# Altium PCB Alarm_PCB_1.PcbDoc
Units mm, origin at the board's own origin, x right, y up, seen from the top; angles counter-clockwise.
Board outline 100.84 x 60.32 mm, 2 copper layers (Top Layer, Bottom Layer); 32 components, 36 nets, 129 pads, 7 vias.
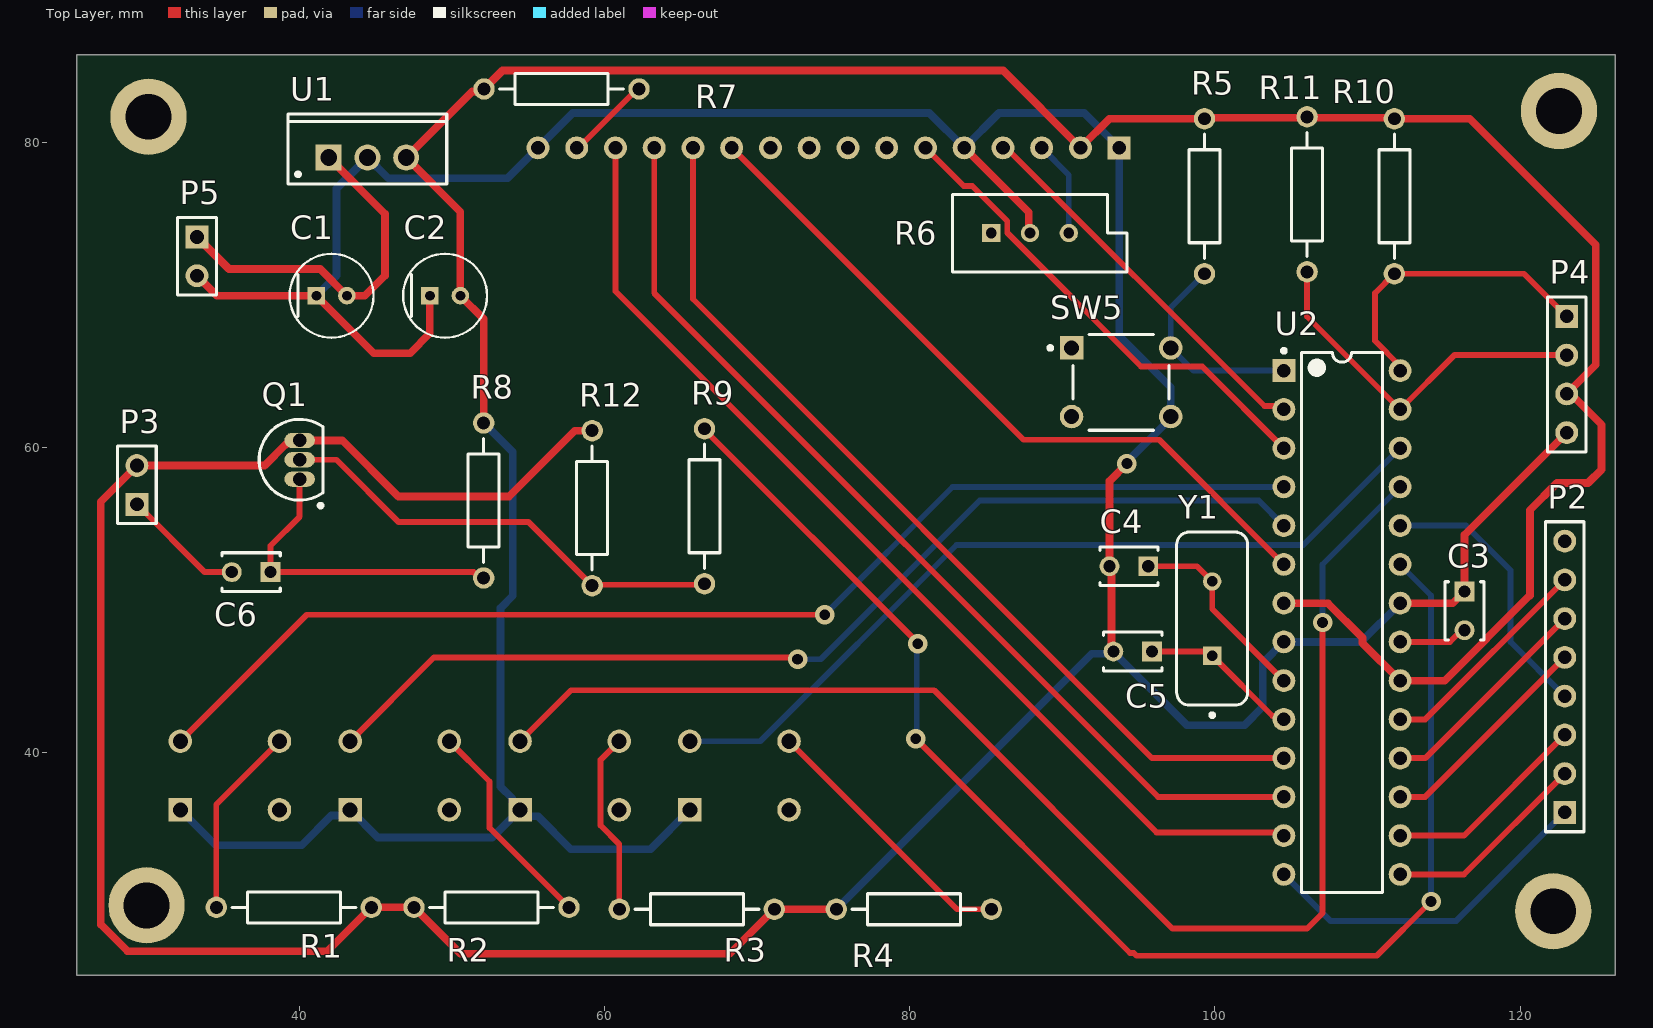
[diagram p0: Top Layer view]
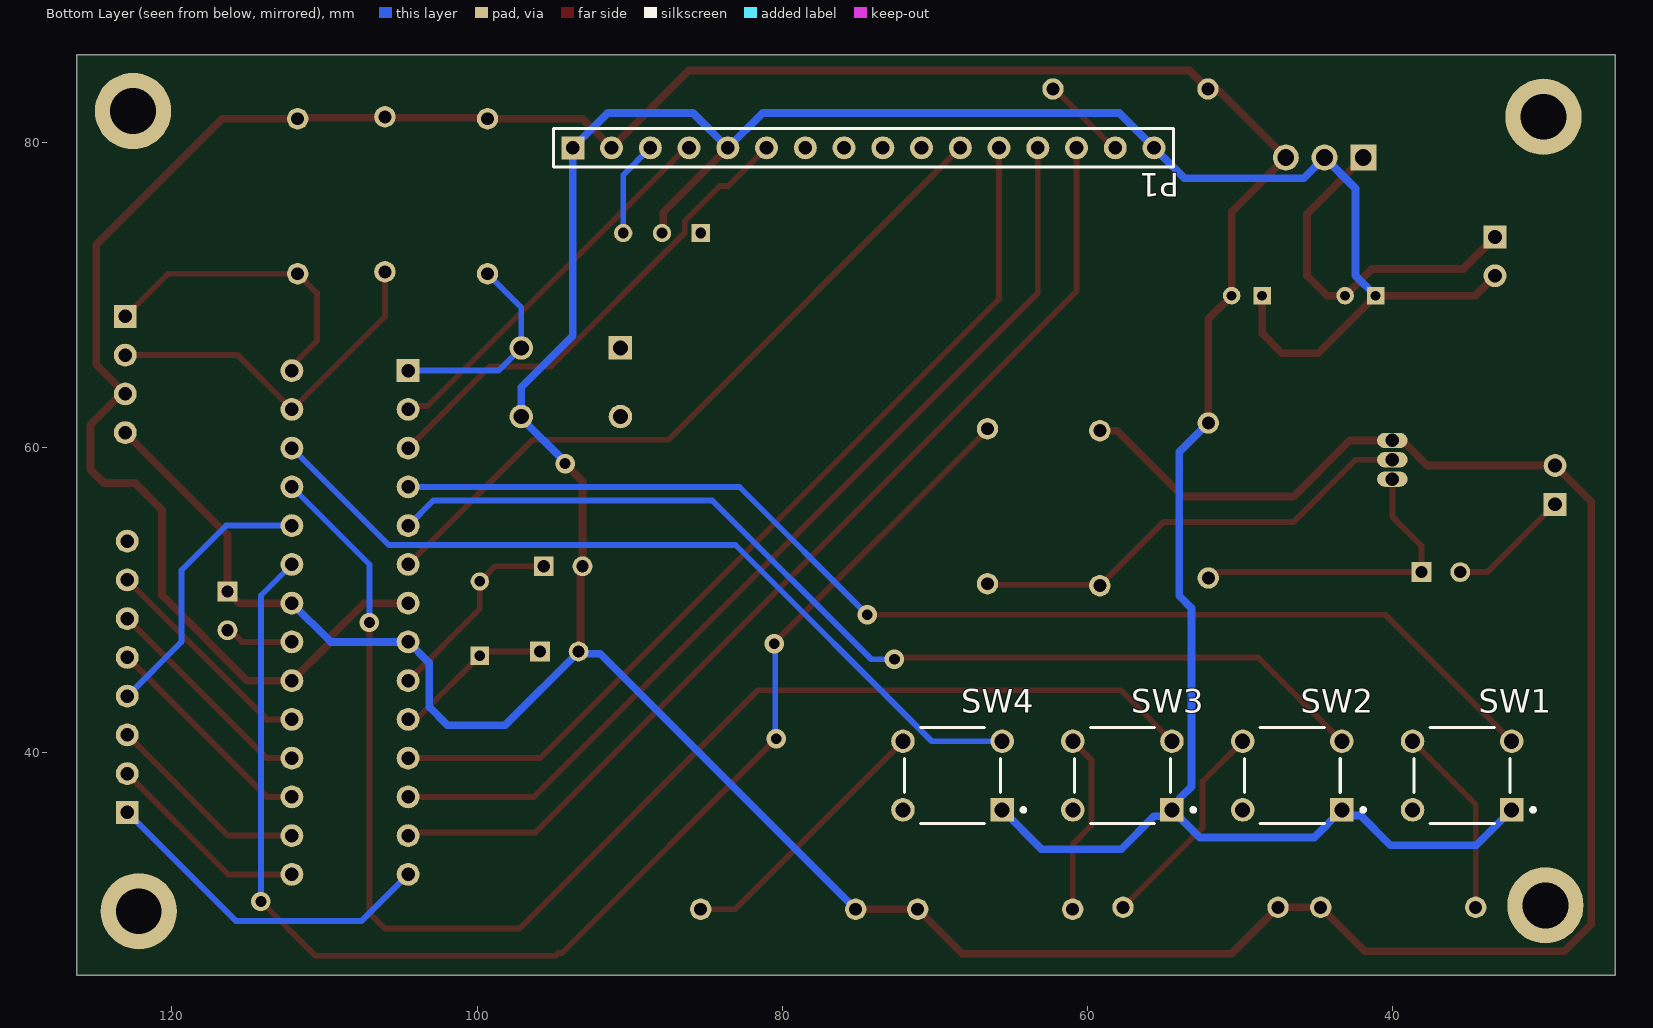
[diagram p1: Bottom Layer view, seen from below]
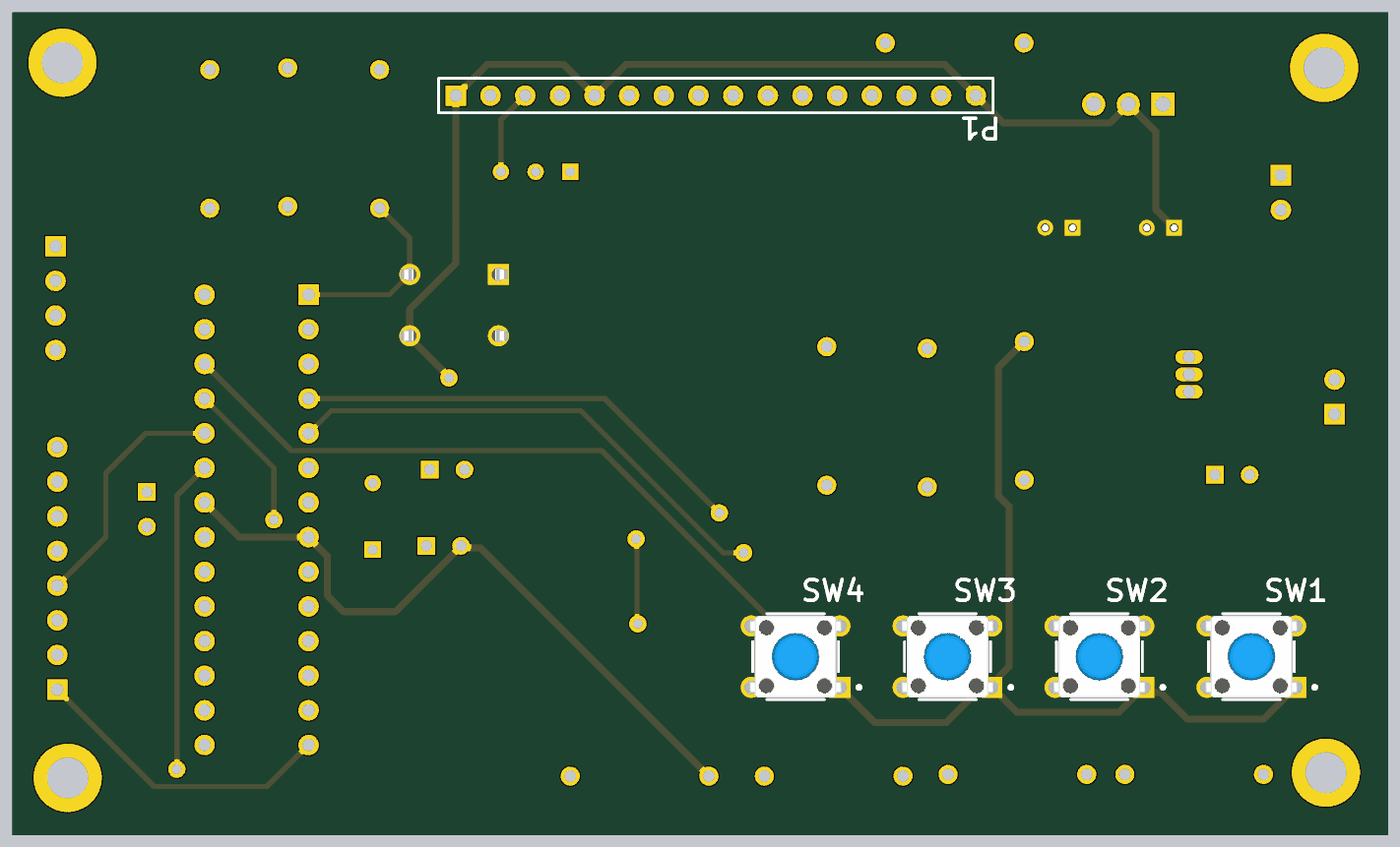
[diagram p2: 3D render of the assembled board from below, using the file's embedded part models]

## Layer stack, top to bottom
Top Solder: solder mask 0.0102, Solder Resist, Dk 3.5
Top Layer: signal copper 0.0356
Dielectric 1: dielectric 0.32, FR-4, Dk 4.8
Bottom Layer: signal copper 0.0356
Bottom Solder: solder mask 0.0102, Solder Resist, Dk 3.5

## Board outline
25.4,25.4 126.238,25.4 126.238,85.725 25.4,85.725

## Design rules (kind name [scope] priority, off if disabled: settings)
AssemblyTestPointUsage [All] p1: valid=2
Clearance [All] p1: gap=0.254 ignorepadtopadclearanceinfootprint=FALSE except(0: Arc-Hole Track-Hole SMDPad-Hole THPad-Hole Via-Hole Fill-Hole Poly-Hole Region-Hole Text-Hole)
FabricationTestPointUsage [All] p1: valid=2 allowmultiple=FALSE
HoleSize [All] p1: absolutevalues=TRUE maxlimit=3 minlimit=0.025 maxpercent=80.000 minpercent=20.000
PolygonConnect [All] p1: connectstyle=Relief reliefconductorwidth=0.254 reliefentries=4 polygonreliefangle="90 Angle" airgapwidth=0.254
RoutingVias [All] p1: holewidth=0.711 width=1.27 viastyle="Through Hole" minholewidth=0.711 minwidth=1.27 maxholewidth=0.711 maxwidth=1.27
SolderMaskExpansion [All] p1: expansion=0.102 istentingtop=FALSE
Width Width_1 [InNet('+5') or InNet('GND') or InNet('VCC')] p1: maxlimit=0.635 minlimit=0.381 preferedwidth=0.508
Width [All] p2: maxlimit=0.508 minlimit=0.254 preferedwidth=0.381
27 further rules are at their usual default settings.

## Components (designator, comment, footprint, x,y, rotation, side; value= is the part's Value field where it differs from the comment)
C1 "UVR2AR22MDD1TD" FP-UVR2AR22MDD1TD-MFG 42.1,69.934 r0 top
C2 "UVR2AR22MDD1TD" FP-UVR2AR22MDD1TD-MFG 49.54,69.934 r0 top
C3 "C315C103K1R5TA" KEMT-C315-THT-2 116.367,49.282 r270 top value=1uF
C4 "C315C103K1R5TA" KEMT-C315-THT-2 94.361,52.197 r180 top value=22pF
C5 "C315C103K1R5TA" KEMT-C315-THT-2 94.615,46.609 r180 top value=22pF
C6 "C315C103K1R5TA" KEMT-C315-THT-2 36.83,51.816 r180 top value=50nF
P1 "Header 16" HDR1X16 93.726,79.629 r180 bottom
P2 "Header 8" HDR1X8 122.936,36.068 r90 top
P3 "Header 2" HDR1X2 29.337,56.261 r90 top
P4 "Header 4" HDR1X4 123.063,68.58 r270 top
P5 "Header 2" HDR1X2 33.274,73.787 r270 top
Q1 "NPN" TO-226-AA 40.005,59.182 r0 top
R1 "Res2" AXIAL-0.4 39.624,29.845 r180 top value=10K
R2 "Res2" AXIAL-0.4 52.578,29.845 r0 top value=10K
R3 "Res2" AXIAL-0.4 66.04,29.718 r180 top value=10K
R4 "Res2" AXIAL-0.4 80.264,29.718 r0 top value=10K
R5 "Res2" AXIAL-0.4 99.314,76.454 r90 top value=10K
R6 "RPot" VR5 87.884,74.041 r0 top value=1K
R7 "Res2" AXIAL-0.4 57.174,83.488 r0 top value=330
R8 "Res2" AXIAL-0.4 52.07,56.515 r90 top value=1K
R9 "Res2" AXIAL-0.4 66.548,56.134 r270 top value=1K
R10 "Res2" AXIAL-0.4 111.76,76.454 r90 top value=750
R11 "Res2" AXIAL-0.4 106.045,76.581 r90 top value=750
R12 "Res2" AXIAL-0.4 59.182,56.007 r270 top value=10K
SW1 "1-1825910-0" FP-1-1825910-0-MFG 35.433,38.481 r180 bottom
SW2 "1-1825910-0" FP-1-1825910-0-MFG 46.567,38.481 r180 bottom
SW3 "1-1825910-0" FP-1-1825910-0-MFG 57.7,38.481 r180 bottom
SW4 "1-1825910-0" FP-1-1825910-0-MFG 68.834,38.481 r180 bottom
SW5 "1-1825910-0" FP-1-1825910-0-MFG 93.853,64.262 r180 top
U1 "L7805CV" TO220 44.45,78.994 r0 top
U2 "ATmega328-PU" 28P3 108.331,48.514 r0 top
Y1 "FOXSLF/160-20" FOX-FOXSLF160-20 99.822,48.768 r90 top

## Footprints (in the part's own frame and the unit in brackets; to place one, negate y for a bottom-side part, rotate by r counter-clockwise, add the part's x,y. Pads: shape width x height; smd on the part's side, far side on the other; paste and mask are expansions set on the pad)
28P3 [mm] "28-Pin Plastic Dual In-Line Package (PDIP)"
  rect 1.5x1.5 hole 0.9: 1(-3.81,16.51)
  round 1.5 hole 0.9: 2(-3.81,13.97) 3(-3.81,11.43) 4(-3.81,8.89) 5(-3.81,6.35) 6(-3.81,3.81) 7(-3.81,1.27) 8(-3.81,-1.27) 9(-3.81,-3.81) 10(-3.81,-6.35) 11(-3.81,-8.89) 12(-3.81,-11.43) 13(-3.81,-13.97) 14(-3.81,-16.51) 15(3.81,-16.51) 16(3.81,-13.97) 17(3.81,-11.43) 18(3.81,-8.89) 19(3.81,-6.35) 20(3.81,-3.81) 21(3.81,-1.27) 22(3.81,1.27) 23(3.81,3.81) 24(3.81,6.35) 25(3.81,8.89) 26(3.81,11.43) 27(3.81,13.97) 28(3.81,16.51)
  silkscreen extent -3.93,-17.7 2.65,17.93, body extent -3.6,-17.65 3.6,17.65, height 4.58
AXIAL-0.4 [mm] "Axial Device, Thru-Hole; 2 Leads; 0.4 in Pin Spacing"
  round 1.4 hole 0.85: 1(-5.08,0) 2(5.08,0)
  silkscreen extent -4.06,-1.02 4.06,1.02
FOX-FOXSLF160-20 [mm] "THD, 2-Leads, Body 11.35x4.65mm"
  rect 1.2x1.2 hole 0.7: 1(-2.44,0)
  round 1.2 hole 0.7: 2(2.44,0)
  silkscreen extent -6.45,-2.32 5.68,2.32, body extent -5.67,-2.32 5.68,2.33, height 3.6
FP-1-1825910-0-MFG [mm]
  rect 1.54x1.54 hole 0.99 paste-1000 mask+0: 1(3.25,-2.25)
  round 1.54 hole 0.99 paste-1000 mask+0: 2(-3.25,-2.25) 3(3.25,2.25) 4(-3.25,2.25)
  silkscreen extent -3.15,-3.15 4.77,3.15, body extent -3.9,-3 3.9,3, height 7.3
FP-UVR2AR22MDD1TD-MFG [mm]
  rect 1.15x1.15 hole 0.65 paste-1000 mask+0: 1(-1,0)
  round 1.15 hole 0.65 paste-1000 mask+0: 2(1,0)
  silkscreen extent -2.75,-2.75 2.75,2.75, body extent -2.85,-2.85 2.85,2.85, height 0.25
HDR1X2 [mm] "Connector; Header; 2 Position"
  rect 1.5x1.5 hole 0.9: 1(0,0)
  round 1.5 hole 0.9: 2(2.54,0)
  silkscreen extent -1.27,-1.27 3.81,1.27
HDR1X4 [mm] "Connector; Header; 4 Position"
  rect 1.5x1.5 hole 0.9: 1(0,0)
  round 1.5 hole 0.9: 2(2.54,0) 3(5.08,0) 4(7.62,0)
  silkscreen extent -1.27,-1.27 8.89,1.27
HDR1X8 [mm] "Connector; Header; 8 Position"
  rect 1.5x1.5 hole 0.9: 1(0,0)
  round 1.5 hole 0.9: 2(2.54,0) 3(5.08,0) 4(7.62,0) 5(10.16,0) 6(12.7,0) 7(15.24,0) 8(17.78,0)
  silkscreen extent -1.27,-1.27 19.05,1.27
HDR1X16 [mm] "Connector; Header; 16 Position"
  rect 1.5x1.5 hole 0.9: 1(0,0)
  round 1.5 hole 0.9: 2(2.54,0) 3(5.08,0) 4(7.62,0) 5(10.16,0) 6(12.7,0) 7(15.24,0) 8(17.78,0) 9(20.32,0) 10(22.86,0) 11(25.4,0) 12(27.94,0) 13(30.48,0) 14(33.02,0) 15(35.56,0) 16(38.1,0)
  silkscreen extent -1.27,-1.27 39.37,1.27
KEMT-C315-THT-2 [mm] "THD, 2-Leads, Body 3.81x2.54mm"
  rect 1.3x1.3 hole 0.8: 1(-1.27,0)
  round 1.3 hole 0.8: 2(1.27,0)
  silkscreen extent -1.91,-1.27 1.91,1.27, body extent -1.91,-1.27 1.91,1.27, height 4.66
TO220 [mm] "TO, Thru-Hole, Vertical, Heatsink Mounted; 3 In-Line Leads; Pitch 2.54 mm"
  rect 1.7x1.7 hole 1.1: 1(-2.54,0)
  round 1.7 hole 1.1: 2(0,0) 3(2.54,0)
  silkscreen extent -5.2,-1.75 5.2,2.85, body extent -5.25,-1.8 5.25,2.9, height 19.7
TO-226-AA [mm] "TO, Flat Index; 3 In-Line, Axial Leads; Body Dia. 4.8mm; Leads 0.55 x 0.51 mm (max)"
  oval 2x1 hole 0.9: 1(0,-1.27) 2(0,0) 3(0,1.27)
  silkscreen extent -2.65,-3.13 1.52,2.65, body extent -2.65,-2.66 1.52,2.66, height 5.33
VR5 [mm] "Thru-Hole; 3 Leads"
  rect 1.2x1.2 hole 0.7: 1(-2.54,0)
  round 1.2 hole 0.7: 2(0,0) 3(2.54,0)
  silkscreen extent -5.08,-2.54 6.35,2.54

## Part data
C1: library part CMP-12462-000035-1, "CAP ALUM 0.22UF 20% 100V RADIAL", Capacitance=330nF, Case/Package=Radial, Dielectric Material=Aluminium, Max Operating Temperature=85°C, Min Operating Temperature=-40°C, Package Quantity=2000, Ripple Current=4.7mA, Tolerance=20%, Voltage Rating=100V, Diameter=5mm, Dissipation Factor=0.08%, Height=11mm, Height - Seated (Max)=0.492inch, Lead Pitch=2mm, Lead/Base Style=Straight, Length=11mm, Life (Hours)=2000Hour, Mount="Through Hole", Packaging="Tape and Reel", REACH SVHC="No SVHC", RoHS Compliant=Yes, Series=VR, Termination=Radial, Voltage Rating (DC)=100V
C2: library part CMP-12462-000035-1, "CAP ALUM 0.22UF 20% 100V RADIAL", Capacitance=100nF, Case/Package=Radial, Dielectric Material=Aluminium, Max Operating Temperature=85°C, Min Operating Temperature=-40°C, Package Quantity=2000, Ripple Current=4.7mA, Tolerance=20%, Voltage Rating=100V, Diameter=5mm, Dissipation Factor=0.08%, Height=11mm, Height - Seated (Max)=0.492inch, Lead Pitch=2mm, Lead/Base Style=Straight, Length=11mm, Life (Hours)=2000Hour, Mount="Through Hole", Packaging="Tape and Reel", REACH SVHC="No SVHC", RoHS Compliant=Yes, Series=VR, Termination=Radial, Voltage Rating (DC)=100V
C3 C4 C5 C6: library part CMP-1664-00007-1, "Capacitor, Ceramic, 0.01 uF, +/- 10%, 100 V, X7R, -55 to 125 degC, 2-Pin THD, RoHS, Bulk", Case\Package=PDIP, Forward Current="60 mA", Forward Voltage="1.5 V", Max Operating Temperature="100 degC", Max Power Dissipation="400 mW", Min Operating Temperature="-55 degC", Output Voltage="70 V", Package Quantity=2000, Channels=2, ComponentLink1Description="Manufacturer URL", ComponentLink1URL=http://www.kemet.com/, ComponentLink2Description=Datasheet, ComponentLink2URL=http://capacitoredge.kemet.com/capedge2/DataSheet/Datasheet-C315C103K1R5TA.pdf?pn=C315C103K1R5TA{BULK}, DatasheetVersion=Aug-16, Mount="Through Hole", Nominal Vf="1.3 V", PackageDescription="2-Pin Through Hole Device, Body 3.81 x 2.54 mm", PackageReference=C315-THT-2, Packaging=Rail/Tube, Pins=16, Radiation Hardening=No, REACH SVHC=Unknown, RoHSCompliant=true, Vce Max="500 mV"
P1: "Header, 16-Pin", LatestRevisionDate=17-Jul-2002, LatestRevisionNote="Re-released for DXP Platform.", Publisher="Altium Limited"
P2: "Header, 8-Pin", LatestRevisionDate=17-Jul-2002, LatestRevisionNote="Re-released for DXP Platform.", Publisher="Altium Limited"
P3 P5: "Header, 2-Pin", LatestRevisionDate=17-Jul-2002, LatestRevisionNote="Re-released for DXP Platform.", Publisher="Altium Limited"
P4: "Header, 4-Pin", LatestRevisionDate=17-Jul-2002, LatestRevisionNote="Re-released for DXP Platform.", Publisher="Altium Limited"
Q1: "NPN Bipolar Transistor", Code_JEDEC=TO-226-AA, LatestRevisionDate=17-Jul-2002, LatestRevisionNote="Re-released for DXP Platform.", PackageDescription="TO, Flat Index; 3 In-Line, Axial Leads; Body Dia. 4.8mm; Leads 0.55 x 0.51 mm (max)", PackageReference=TO-226-AA, Published=8-Jun-2000, Publisher="Altium Limited"
R1 R2 R3 R4 R5 R7 R8 R9 R10 R11 R12: "Resistor", LatestRevisionDate=17-Jul-2002, LatestRevisionNote="Re-released for DXP Platform.", PackageDescription="Axial Device, Thru-Hole; 2 Leads; 0.4 in Pin Spacing", PackageReference=AXIAL-0.4, Published=8-Jun-2000, Publisher="Altium Limited"
R6: "Potentiometer", LatestRevisionDate=17-Jul-2002, LatestRevisionNote="Re-released for DXP Platform.", PackageDescription="Variable Resistor, Thru-Hole; 3 Leads", PackageReference=VR5, Published=8-Jun-2000, Publisher="Altium Limited", Set Position=0.5, Sim Note="Enter the Resistance value and the set point into parameter fields."
SW1 SW2 SW3 SW4 SW5: library part CMP-03407-000018-1, "SWITCH TACTILE SPST-NO 0.05A 24V", Actuator Color=Blue, Contact Current Rating=50mA, Contact Resistance=100mR, Max Operating Temperature=85°C, Max Voltage Rating (DC)=24V, Min Operating Temperature=-35°C, Operating Force=1.56N, Package Quantity=750, Actuator Length=3.4mm, Actuator Material=Nylon, Actuator Type=Standard, Contact Material=Brass, Contact Plating=Silver, Depth=5.99mm, Electrical Life=100000Cycles, Illumination Type=Non-Illuminated, Length=5.99mm, Max Current Rating=50mA, Mechanical Life=100000Cycles, Mount="Through Hole", Orientation=Straight, Packaging="Loose Piece", Radiation Hardening=No, RoHS Compliant=Yes, Series="FSMJ, Alcoswitch", Switch Function=Off-Mom, Switch Travel=0.25mm, Termination="PC Pins", Throw Configuration=SPST, Type=Switch, Voltage Rating (DC)=24V
U1: library part CMP-0244-00483-1, "Positive Voltage Regulator, 5V, 3-Pin TO-220", ComponentLink1Description="Manufacturer URL", ComponentLink1URL=http://www.st.com, ComponentLink2Description=Datasheet, ComponentLink2URL=http://www.st.com/internet/com/TECHNICAL_RESOURCES/TECHNICAL_LITERATURE/DATASHEET/CD00000444.pdf, ComponentLink3Description="Package Specification", ComponentLink3URL=http://www.st.com/internet/com/TECHNICAL_RESOURCES/TECHNICAL_LITERATURE/PACKAGE_INFORMATION/CD00004649.pdf, DatasheetVersion=16/11/2011, PackageDescription="TO, Thru-Hole, Vertical, Heatsink Mounted; 3 In-Line Leads; Pitch 2.54 mm", PackageReference=TO220, PackageVersion=ver3.0
U2: library part CMP-0095-00015-2, "8-bit AVR Microcontroller, 32KB Flash, 1KB EEPROM, 2KB SRAM, 28-pin PDIP, Industrial Grade (-40°C to 85°C)", ComponentLink1Description="Manufacturer URL", ComponentLink1URL=http://www.atmel.com/, ComponentLink2Description="ATmega48A/48PA/88A/88PA/168A/168PA/328/328P Datasheet", ComponentLink2URL=http://www.atmel.com/dyn/resources/prod_documents/8271.pdf, ComponentLink3Description="ATmega48A/48PA/88A/88PA/168A/168PA/328/328P Summary", ComponentLink3URL=http://www.atmel.com/dyn/resources/prod_documents/8271S.pdf, DatasheetVersion="revD, May-2011", PackageDescription="28-lead (0.300\"/7.62mm Wide) Plastic Dual Inline Package (PDIP)", PackageReference=28P3, PackageVersion="revB, Sep-2001", RevisionNote="DatasheetVersion updated. URLs added."
Y1: library part CMP-1749-00003-1, "Resistance Weld Thru-Hole Crystal, 16 MHz, -20 to 70 degC, 2-Pin THD, RoHS, Bulk", Case\Package=Axial, Max Operating Temperature="155 degC", Min Operating Temperature="-55 degC", Package Quantity=200, Power Rating="250 mW", Resistance="221 kohm", Tolerance=1%, Voltage Rating="250 V", ComponentLink1Description="Manufacturer URL", ComponentLink1URL=http://www.foxonline.com/, ComponentLink2Description=Datasheet, ComponentLink2URL=http://www.foxonline.com/pdfs/hc49slf.pdf, DatasheetVersion=Mar-15, Length="0.248 inch", Mount="Through Hole", PackageDescription="2-Pin Through Hole Device, Body 11.35 x 4.65 mm", PackageReference=FOXSLF160-20, Packaging=Bulk, RoHSCompliant=true

## Free pads (board coordinates)
  round 5 hole 3: 11(29.972,29.972) 12(122.174,29.591) 13(122.555,82.042) 14(30.099,81.661)

## Via types
v1: diameter 1.27, hole 0.711, Top Layer to Bottom Layer, 7 vias

## Nets (pads, with @x,y where several pads share a name; then routed paths per layer and width w, separated by ;. In a path a pad name is that pad's centre, name@x,y a point inside that pad or via, vN(x,y) a via of type N, cw(c..) or ccw(c..) an arc to the next point about the centre after c; other vN are vias at no path point)
+5: C2.2 P1.2 P4.3 R5.2 R7.1 R8.2 R10.2 R11.2 SW1.1 SW2.1 SW3.1 SW4.1 U1.3 U2.7 U2.20 | length 221
  Top Layer w0.508: R8.2 52.07,68.405 C2.2 50.54,75.444 U1.3 51.313,83.317 51.924,83.317 R7.1 53.302,84.696 86.119,84.696 P1.2 93.091,81.534 R5.2 99.377,81.597 105.981,81.597 R11.2 106.108,81.597 111.697,81.597 R10.2 116.713,81.534 124.968,73.279 124.968,65.405 P4.3 123.317,63.5 125.349,61.468 125.349,58.547 124.46,57.658 122.428,57.658 120.65,55.88 120.65,50.292 115.062,44.704 U2.20 109.679,47.166 109.679,47.512 107.407,49.784 U2.7
  Bottom Layer w0.508: SW1.1 34.505,33.909 40.132,33.909 42.085,35.862 42.947,35.862 SW2.1 45.131,34.417 52.636,34.417 SW3.1 ; R8.2 53.975,59.69 53.975,50.261 53.172,49.458 53.172,37.76 53.934,36.998 53.934,36.747 SW3.1 ; SW4.1 63.008,33.655 57.785,33.655 55.63,35.81 54.872,35.81 SW3.1
B0: P2.1 U2.14 | length 22.6
  Bottom Layer w0.381: U2.14 107.569,28.956 115.824,28.956 P2.1
B1: P2.2 U2.15 | length 13.5
  Top Layer w0.381: U2.15 116.332,32.004 P2.2
B2: P2.3 U2.16 | length 13.5
  Top Layer w0.381: U2.16 116.332,34.544 P2.3
B3: P2.5 U2.17 | length 14.6
  Top Layer w0.381: U2.17 113.792,37.084 P2.5
B4: P2.6 U2.18 | length 14.6
  Top Layer w0.381: U2.18 113.792,39.624 P2.6
B5: P2.7 U2.19 | length 14.6
  Top Layer w0.381: U2.19 113.792,42.164 P2.7
C0: R9.1 U2.23 | length 90.2
  Top Layer w0.381: R9.1 66.548,61.151 80.518,47.18 v1(80.518,47.117) ; v1(80.391,40.894) 94.432,26.853 94.686,26.853 94.869,26.67 110.617,26.67 v1(114.173,30.226)
  Bottom Layer w0.381: v1(80.391,40.894) 80.454,40.957 80.454,47.053 v1(80.518,47.117) ; U2.23 114.173,50.292 v1(114.173,30.226)
C1: P2.4 U2.24 | length 18.2
  Bottom Layer w0.381: U2.24 116.459,54.864 119.38,51.943 119.38,47.244 P2.4
C2: SW3.3 U2.25 | length 90.9
  Top Layer w0.381: SW3.3 57.788,44.069 81.598,44.069 97.219,28.448 106.045,28.448 107.061,29.464 v1(107.061,48.514)
  Bottom Layer w0.381: v1(107.061,48.514) 107.061,52.324 U2.25
C3: SW4.3 U2.26 | length 54.5
  Bottom Layer w0.381: SW4.3 70.195,40.731 83.058,53.594 105.791,53.594 U2.26
D2: SW1.3 U2.4 | length 79.2
  Top Layer w0.381: SW1.3 40.474,49.022 v1(74.422,49.022)
  Bottom Layer w0.381: v1(74.422,49.022) 82.804,57.404 U2.4
D3: SW2.3 U2.5 | length 68.5
  Top Layer w0.381: SW2.3 48.814,46.228 72.517,46.228 v1(72.644,46.101)
  Bottom Layer w0.381: v1(72.644,46.101) 74.168,46.101 84.582,56.515 102.87,56.515 U2.5
D4: P1.11 U2.6 | length 47.5
  Top Layer w0.381: P1.11 87.458,60.497 96.348,60.497 U2.6
D5: P1.12 U2.11 | length 61.1
  Top Layer w0.381: P1.12 65.786,69.723 95.885,39.624 U2.11
D6: P1.13 U2.12 | length 64.5
  Top Layer w0.381: P1.13 63.246,70.104 96.266,37.084 U2.12
D7: P1.14 U2.13 | length 68
  Top Layer w0.381: P1.14 60.706,70.231 96.179,34.758 104.307,34.758 U2.13
E: P1.6 U2.3 | length 32.1
  Top Layer w0.381: P1.6 83.535,77.12 84.094,77.12 86.389,74.825 86.389,74.059 95.15,65.297 99.168,65.297 U2.3
GND: C1.1 C2.1 C3.1 C4.2 C5.2 P1.1 P1.5 P1.16 P3.2 P4.4 P5.2 Q1.3 R1.1 R2.1 R3.1 R4.1 R6.2 R12.1 SW5.4 U1.2 U2.8 U2.22 | length 315
  Top Layer w0.508: P5.2 34.587,69.934 C1.1 44.867,66.167 47.244,66.167 48.54,67.463 C2.1 ; R12.1 58.039,61.087 53.721,56.769 46.482,56.769 42.799,60.452 40.599,60.452 40.372,60.452 Q1.3 39.372,60.452 39.11,60.19 39.087,60.19 37.698,58.801 P3.2 26.964,56.428 26.964,28.726 28.726,26.964 41.823,26.964 R1.1 R2.1 50.546,26.797 68.199,26.797 69.806,28.404 R3.1 R4.1 ; P1.5 87.792,75.403 87.792,74.133 R6.2 ; C5.2 93.218,46.736 93.218,52.07 C4.2 93.091,57.785 v1(94.234,58.928) ; U2.22 115.599,49.784 C3.1 116.367,54.264 P4.4
  Bottom Layer w0.508: C1.1 42.418,71.252 42.418,76.962 U1.2 45.808,77.636 53.633,77.636 P1.16 57.912,81.915 81.28,81.915 P1.5 85.852,81.915 91.44,81.915 93.23,80.125 P1.1 93.726,67.31 97.103,63.933 97.103,61.905 94.234,59.036 v1(94.234,58.928) ; R4.1 91.933,46.467 93.203,46.467 C5.2 98.171,41.783 101.937,41.783 103.134,42.98 103.134,45.857 U2.8 109.601,47.244 U2.22
NetC3_2: C3.2 U2.21 | length 4.5
  Top Layer w0.381: U2.21 115.407,47.244 116.174,48.012 C3.2
NetC4_1: C4.1 U2.9 Y1.2 | length 13.1
  Top Layer w0.381: C4.1 98.833,52.197 Y1.2 99.822,49.403 U2.9
NetC5_1: C5.1 U2.10 Y1.1 | length 10.5
  Top Layer w0.381: C5.1 99.541,46.609 Y1.1 103.772,42.378 104.307,42.378 U2.10
NetC6_1: C6.1 Q1.1 R8.1 | length 21
  Top Layer w0.381: Q1.1 40.005,55.454 38.1,53.549 C6.1 51.413,51.816 51.794,51.435 R8.1
NetC6_2: C6.2 P3.1 | length 8.1
  Top Layer w0.381: P3.1 33.782,51.816 C6.2
NetP1_3: P1.3 R6.3 | length 6.3
  Bottom Layer w0.381: P1.3 90.424,77.851 R6.3
NetP1_15: P1.15 R7.2 | length 5.7
  Top Layer w0.381: P1.15 58.281,79.629 62.139,83.488 R7.2
NetQ1_2: Q1.2 R9.2 R12.2 | length 30
  Top Layer w0.381: Q1.2 42.418,59.182 46.507,55.093 55.016,55.093 R12.2 59.245,50.99 66.484,50.99 R9.2
NetR1_2: R1.2 SW1.4 | length 12.6
  Top Layer w0.381: R1.2 34.544,36.592 SW1.4
NetR2_2: R2.2 SW2.4 | length 14.1
  Top Layer w0.381: SW2.4 52.451,38.097 52.451,35.052 R2.2
NetR3_2: R3.2 SW3.4 | length 12
  Top Layer w0.381: SW3.4 59.736,39.516 59.736,35.21 60.96,33.986 R3.2
NetR4_2: R4.2 SW4.4 | length 17.8
  Top Layer w0.381: SW4.4 83.097,29.718 R4.2
NetR5_1: R5.1 SW5.2 U2.1 | length 13.8
  Bottom Layer w0.381: R5.1 97.103,69.163 SW5.2 98.591,65.024 U2.1
RS: P1.4 U2.2 | length 25.5
  Top Layer w0.381: P1.4 86.313,79.629 103.244,62.698 104.307,62.698 U2.2
SCL: P4.1 R10.1 U2.28 | length 20
  Top Layer w0.381: U2.28 112.141,65.327 110.49,66.978 110.49,70.104 R10.1 120.269,71.374 P4.1
SDA: P4.2 R11.1 U2.27 | length 23.9
  Top Layer w0.381: R11.1 106.045,68.58 U2.27 115.697,66.04 P4.2
VCC: C1.2 P5.1 U1.1 | length 23.7
  Top Layer w0.508: P5.1 35.376,71.685 41.35,71.685 C1.2 44.28,69.934 45.593,71.247 45.593,75.311 U1.1
pads on no net: P1.7 P1.8 P1.9 P1.10 P2.8 R6.1 SW1.2 SW2.2 SW3.2 SW4.2 SW5.1 SW5.3

## Silkscreen, mask and mechanical layers (free items; w line width, h text height)
Outline:
  lines w0.254: 25.4,25.4 25.4,85.725 126.238,85.725 126.296,85.667 126.296,25.4 25.4,25.4